# EAGLE board midi-vidi (EAGLE 6.6.0)
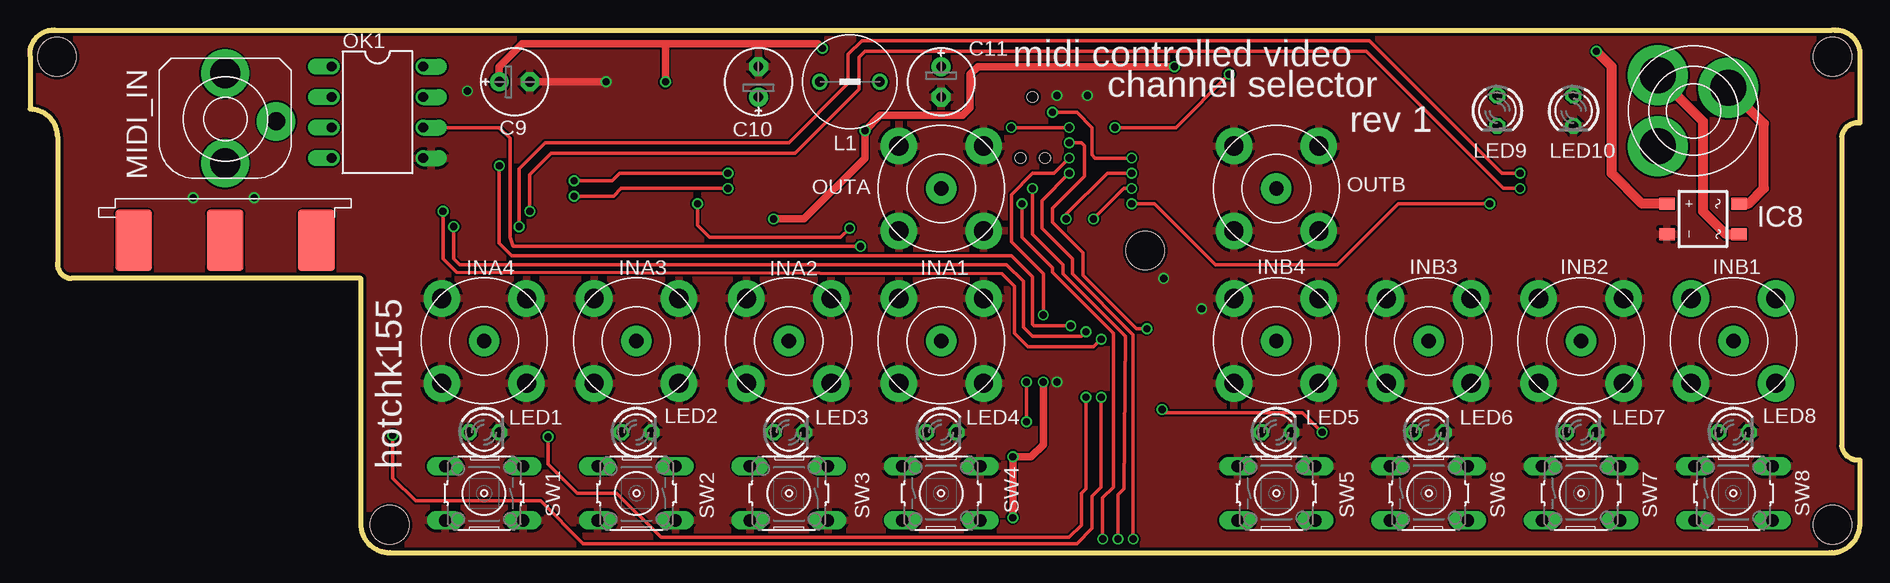
[diagram p0: board, top side]
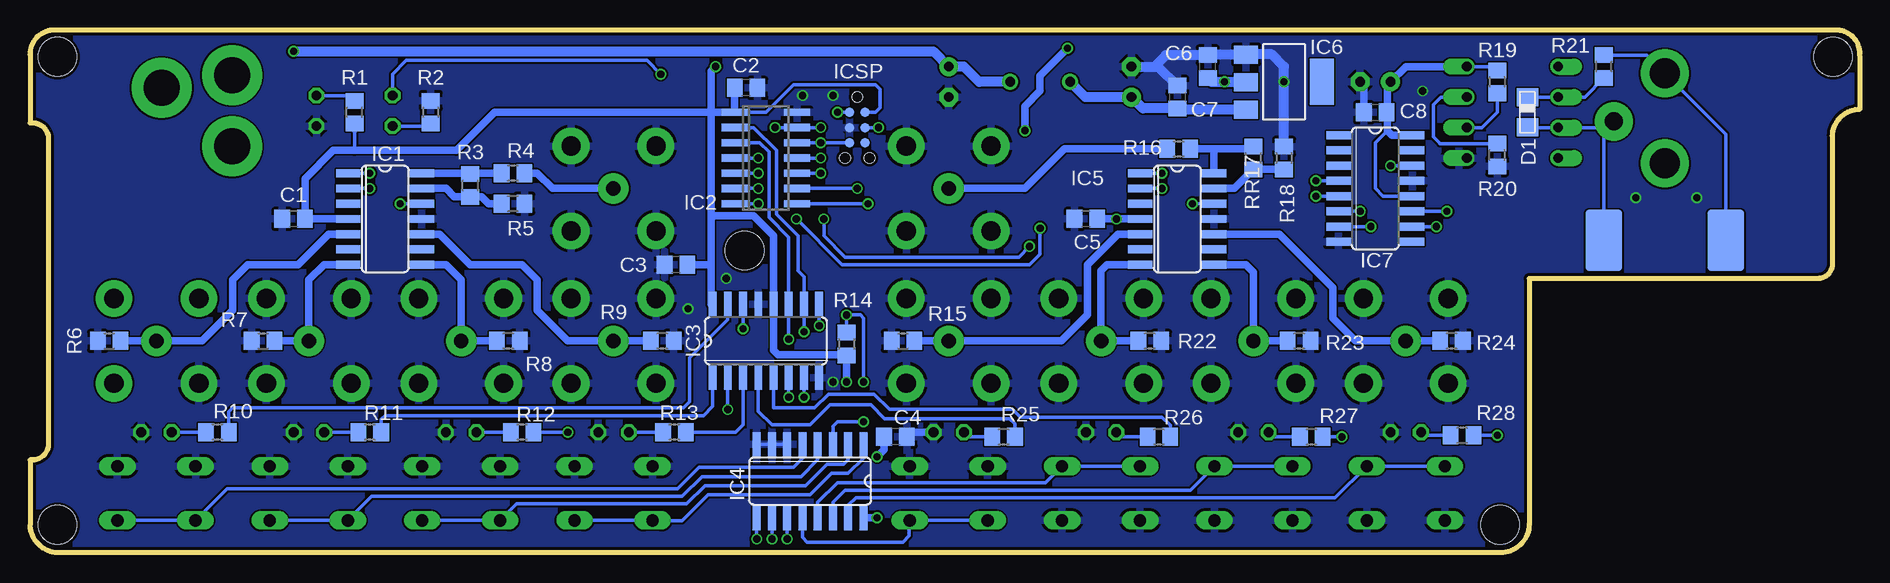
[diagram p1: board, bottom side, seen from below]

Size 152.53 x 43.56 mm. Coordinates in mm from the lower left corner, seen from the top.
Outline: 150.25,43.56 2.04,43.56 arc97 0.01,41.4 0.01,36.96 arc-90 2.29,34.67 2.29,24.13 arc90 3.44,22.86 27.57,22.86 27.57,2.41 arc90 29.98,0 149.99,0 arc90 152.53,2.29 152.53,7.75 arc-90 151.01,8.89 151.01,34.67 arc-90 152.53,35.82 152.53,41.53 arc90 150.5,43.56 150.38,43.56
Copper layers (1*16): Top 0.035mm / dielectric 1.5mm / Bottom 0.035mm
Design rules "ITEADstudio_DRC": minimum track width 6mil, minimum drill 12mil, track to track 6mil, track to pad 6mil, pad to pad 6mil, via to via 6mil, smd to smd 0mil, copper to edge 10mil, drill to drill 10mil, minimum pad ring 10mil, minimum via ring 6mil, stop-mask expansion 2mil, vias tented up to drill 100mil, thermal gap 10mil
Holes 3.2 mm at 29.98,2.33 150.26,2.33 2.26,41.33 150.26,41.33 92.97,25.2

## Footprints (pad centres in the part's own frame; a part is rotated, then mirrored left to right if it is on the bottom)
C0805 = smd 1.3 x 1.5: 1 -0.95,0; 2 0.95,0
E2,5-6E = drill 0.813 pad 1.575: + -1.27,0 | drill 0.813 pad 1.575 octagon: - 1.27,0
0805DIODE = smd 1.524 x 1.778: A -1.262,-0.005; C 1.238,-0.005
SO14 = smd 0.66 x 2.032: 1 -3.81,-3.073; 2 -2.54,-3.073; 3 -1.27,-3.073; 4 0,-3.073; 5 1.27,-3.073; 6 2.54,-3.073; 7 3.81,-3.073; 8 3.81,3.073; 9 2.54,3.073; 10 1.27,3.073; 11 0,3.073; 12 -1.27,3.073; 13 -2.54,3.073; 14 -3.81,3.073
SO14' = smd 0.6 x 2.2: 1 -3.81,-2.6; 2 -2.54,-2.6; 3 -1.27,-2.6; 4 0,-2.6; 5 1.27,-2.6; 6 2.54,-2.6; 7 3.81,-2.6; 8 3.81,2.6; 9 2.54,2.6; 10 1.27,2.6; 11 0,2.6; 12 -1.27,2.6; 13 -2.54,2.6; 14 -3.81,2.6
SO16 = smd 0.66 x 2.032: 1 -4.445,-3.073; 2 -3.175,-3.073; 3 -1.905,-3.073; 4 -0.635,-3.073; 5 0.635,-3.073; 6 1.905,-3.073; 7 3.175,-3.073; 8 4.445,-3.073; 9 4.445,3.073; 10 3.175,3.073; 11 1.905,3.073; 12 0.635,3.073; 13 -0.635,3.073; 14 -1.905,3.073; 15 -3.175,3.073; 16 -4.445,3.073
SOT223 = smd 1.499 x 2.007: 1 -2.261,-3.15; 2 0.025,-3.15; 3 2.311,-3.15 | smd 3.81 x 2.007: 4 0,3.15
MBS = smd 1 x 1.3: + -1.27,-3; - 1.27,-3; AC1 -1.27,3; AC2 1.27,3
TC2030-MCP-NL = smd 0.787 x 0.787: 1 1.27,-0.635; 2 1.27,0.635; 3 2.54,-0.635; 4 2.54,0.635; 5 3.81,-0.635; 6 3.81,0.635 | hole 0.889: 0,0; 5.08,-1.016; 5.08,1.016
RCAVERT = drill 1.6 pad 3.048: P$2 -5,0; P$3 5,0; P$4 0,5; P$5 0,-5 | drill 1.2 pad 2.54: PIN 0,0
WE-TI_L = drill 0.813: 1 -2.5,0; 2 2.5,0
LED3MM = drill 0.813 octagon: A -1.27,0; K 1.27,0
VERTICAL_3_5MM_SOCKET = drill 2.5 pad 4: 2 0,-3.75; 4 0,3.75 | drill 1.5 pad 3.2: 3 4.25,-0.25
EDGEDIN = smd 3.048 x 5.08: 1 -7.62,-10.16; 2 0,-10.16; 3 7.62,-10.16 | smd 3.048 x 5.08 bottom: 4 -5.08,-10.16; 5 5.08,-10.16
DIL08 = drill 0.813 offset: 1 -3.81,-3.81; 2 -1.27,-3.81; 3 1.27,-3.81; 4 3.81,-3.81; 5 3.81,3.81; 6 1.27,3.81; 7 -1.27,3.81; 8 -3.81,3.81
R0805 = smd 1.3 x 1.5: 1 -0.95,0; 2 0.95,0
B3F-10XX = drill 1.016 long: 1 -3.251,2.261; 2 3.251,2.261; 3 -3.251,-2.261; 4 3.251,-2.261
PWR_SOCKET_2_1MM = drill 3 pad 5: BARREL 0,4.2; NC -4.2,0; PIN 3.4,-0.7

## Placement (x,y rotation side)
C1  [C0805]  130.56,27.81 180 bottom
C2  [C0805]  92.84,38.74 180 bottom
C3  [C0805]  98.69,24 180 bottom
C4  [C0805]  80.4,9.65 180 bottom
C5  [C0805]  64.52,27.81 180 bottom
C6  [C0805]  54.36,40.51 90 bottom
C7  [C0805]  56.9,37.97 270 bottom
C8  [C0805]  40.39,36.7 0 bottom
C9  [E2,5-6E]  40.39,39.24 0 top
C10  [E2,5-6E]  60.71,39.24 90 top
C11  [E2,5-6E]  75.95,39.24 270 top
D1  0805DIODE  [0805DIODE]  27.69,36.7 270 bottom
IC1  MAX4311SO14  [SO14]  122.94,27.81 270 bottom
IC2  PIC16F1825SO14  [SO14']  91.19,32.89 270 bottom
IC3  74HC595D  [SO16]  91.19,17.65 0 bottom
IC4  4051D  [SO16]  87.51,5.97 180 bottom
IC5  MAX4311SO14  [SO14]  56.9,27.81 270 bottom
IC6  REG1117  [SOT223]  48.01,39.24 270 bottom
IC7  74HC595D  [SO16]  40.39,30.35 270 bottom
IC8  B1S  [MBS]  139.45,27.81 270 top
ICSP  [TC2030-MCP-NL]  83.57,37.97 270 bottom
INA1  RCAVERT  [RCAVERT]  75.95,17.65 45 top
INA2  RCAVERT  [RCAVERT]  63.25,17.65 45 top
INA3  RCAVERT  [RCAVERT]  50.55,17.65 45 top
INA4  RCAVERT  [RCAVERT]  37.85,17.65 45 top
INB1  RCAVERT  [RCAVERT]  141.99,17.65 45 top
INB2  RCAVERT  [RCAVERT]  129.29,17.65 45 top
INB3  RCAVERT  [RCAVERT]  116.59,17.65 45 top
INB4  RCAVERT  [RCAVERT]  103.89,17.65 45 top
L1  [WE-TI_L]  68.33,39.24 0 top
LED1  [LED3MM]  37.85,10.03 0 top
LED2  [LED3MM]  50.55,10.03 0 top
LED3  [LED3MM]  63.25,10.03 0 top
LED4  [LED3MM]  75.95,10.03 0 top
LED5  [LED3MM]  103.89,10.03 0 top
LED6  [LED3MM]  116.59,10.03 0 top
LED7  [LED3MM]  129.29,10.03 0 top
LED8  [LED3MM]  141.99,10.03 0 top
LED9  [LED3MM]  122.31,36.83 270 top
LED10  [LED3MM]  128.66,36.83 270 top
MIDI  VERTICAL_3_5MM_SOCKET  [VERTICAL_3_5MM_SOCKET]  16.26,36.2 0 top
MIDI_IN  DIN5PIN  [EDGEDIN]  16.26,36.2 0 top
OK1  6N138  [DIL08]  28.96,36.7 270 top
OUTA  RCAVERT  [RCAVERT]  75.95,30.35 45 top
OUTB  RCAVERT  [RCAVERT]  103.89,30.35 45 top
R1  [R0805]  125.48,36.7 90 bottom
R2  [R0805]  119.13,36.7 270 bottom
R3  [R0805]  115.83,30.61 90 bottom
R4  [R0805]  112.28,31.62 180 bottom
R5  [R0805]  112.28,29.08 180 bottom
R6  [R0805]  145.93,17.65 0 bottom
R7  [R0805]  133.1,17.65 0 bottom
R8  [R0805]  112.66,17.65 180 bottom
R9  [R0805]  99.83,17.65 180 bottom
R10  [R0805]  136.91,10.03 180 bottom
R11  [R0805]  124.21,10.03 180 bottom
R12  [R0805]  111.51,10.03 180 bottom
R13  [R0805]  98.81,10.03 180 bottom
R14  [R0805]  84.46,17.4 270 bottom
R15  [R0805]  79.76,17.65 0 bottom
R16  [R0805]  56.78,33.66 0 bottom
R18  [R0805]  48.01,32.89 270 bottom
R19  [R0805]  30.23,39.24 270 bottom
R20  [R0805]  30.23,33.15 90 bottom
R21  [R0805]  21.34,40.51 90 bottom
R22  [R0805]  59.19,17.65 180 bottom
R23  [R0805]  46.74,17.65 180 bottom
R24  [R0805]  34.04,17.65 180 bottom
R25  [R0805]  71.38,9.65 180 bottom
R26  [R0805]  58.43,9.65 180 bottom
R27  [R0805]  45.73,9.65 180 bottom
R28  [R0805]  33.15,9.78 180 bottom
RR17  [R0805]  50.55,32.89 90 bottom
SW1  [B3F-10XX]  37.85,4.95 180 top
SW2  [B3F-10XX]  50.55,4.95 180 top
SW3  [B3F-10XX]  63.25,4.95 180 top
SW4  [B3F-10XX]  75.95,4.95 0 top
SW5  [B3F-10XX]  103.89,4.95 0 top
SW6  [B3F-10XX]  116.59,4.95 0 top
SW7  [B3F-10XX]  129.29,4.95 0 top
SW8  [B3F-10XX]  141.99,4.95 0 top
U$2  PWR_SOCKET_2_1MM  [PWR_SOCKET_2_1MM]  138.66,36.83 45 top

## Library data of the parts
C1-C11 R1-R16 R18-R28 RR17 = rcl
D1 IC2 = jasons_stuff
IC1 IC5 INA1-INA4 INB1-INB4 MIDI MIDI_IN OUTA OUTB U$2 = jason_eagle6
IC3 IC7 = 74xx-eu
IC4 = 40xx
IC6 = burr-brown; MPN: REG1117; OC_FARNELL: 1097566; OC_NEWARK: 14P6981
IC8 = rectifier
ICSP = tag-connect
L1 = wuerth-elektronik
LED1-LED10 = led
OK1 = optocoupler; MF: VISHAY/TELEFUNKEN; MPN: 6N138; OC_FARNELL: 9860150; OC_NEWARK: 35K5294
SW1-SW8 = switch-omron; MPN: B3F-1000; OC_FARNELL: 176432; OC_NEWARK: 36M3542

## Nets
A0A: IC5.2 IC7.5
A0B: IC1.2 IC7.6
A1A: IC5.1 IC7.4
A1B: IC1.1 IC7.7
AD0: IC2.8 IC4.11
AD1: IC2.9 IC4.10
AD2: IC2.10 IC4.9
DAT: IC2.12 IC3.14 ICSP.5
GND: C1.2 C2.1 C3.2 C4.1 C5.2 C6.2 C7.1 C8.1 C9.- C10.- C11.- IC1.11 IC2.14 IC3.8 IC3.13 IC4.6 IC4.7 IC4.8 IC5.11 IC6.1 IC7.8 IC7.13 IC8.- ICSP.3 INA1.P$2 INA1.P$3 INA1.P$4 INA1.P$5 INA2.P$2 INA2.P$3 INA2.P$4 INA2.P$5 INA3.P$2 INA3.P$3 INA3.P$4 INA3.P$5 INA4.P$2 INA4.P$3 INA4.P$4 INA4.P$5 INB1.P$2 INB2.P$2 INB2.P$3 INB2.P$4 INB2.P$5 INB3.P$2 INB3.P$3 INB3.P$4 INB3.P$5 INB4.P$2 INB4.P$3 INB4.P$4 INB4.P$5 LED1.K LED2.K LED3.K LED4.K LED5.K LED6.K LED7.K LED8.K LED10.K OK1.5 OUTA.P$2 OUTA.P$3 OUTA.P$4 OUTA.P$5 OUTB.P$2 OUTB.P$3 OUTB.P$4 OUTB.P$5 R2.1 R5.1 R6.1 R7.1 R8.1 R9.1 R15.1 R18.1 R20.1 R22.1 R23.1 R24.1 SW1.1 SW1.2 SW2.1 SW2.2 SW3.1 SW3.2 SW4.1 SW4.2 SW5.1 SW5.2 SW6.1 SW6.2 SW7.1 SW7.2 SW8.1 SW8.2
IN: IC2.11 IC4.3 R14.1
MIDI: IC2.5 OK1.6 R19.2
N$1: IC5.10 INA4.PIN R24.2
N$2: IC5.8 INA3.PIN R23.2
N$3: IC5.7 INA2.PIN R22.2
N$4: IC5.5 INA1.PIN R15.2
N$5: IC5.14 R16.2 RR17.2
N$6: IC5.13 R18.2 RR17.1
N$7: OUTA.PIN R16.1
N$8: D1.A OK1.2 R21.1
N$9: MIDI.4 MIDI_IN.4 R21.2
N$10: IC1.7 INB2.PIN R7.2
N$11: IC1.8 INB3.PIN R8.2
N$12: IC1.5 INB1.PIN R6.2
N$13: IC1.14 R3.2 R4.2
N$14: IC1.13 R3.1 R5.2
N$15: C7.2 C10.+ IC6.3 L1.1
N$16: OUTB.PIN R4.1
N$17: IC1.10 INB4.PIN R9.2
N$18: D1.C MIDI.3 MIDI_IN.5 OK1.3
N$19: LED8.A R10.2
N$20: LED7.A R11.2
N$21: LED6.A R12.2
N$22: OK1.7 R20.2
N$23: IC3.15 R10.1
N$24: LED5.A R13.2
N$25: IC3.1 R11.1
N$26: IC3.2 R12.1
N$27: IC3.3 R13.1
N$28: IC3.4 R25.1
N$29: IC3.5 R26.1
N$30: IC3.6 R28.1
N$31: IC3.7 R27.1
N$32: LED4.A R25.2
N$33: LED3.A R26.2
N$34: LED1.A R28.2
N$35: LED2.A R27.2
N$36: LED9.K R2.2
N$37: IC4.4 SW7.3 SW7.4
N$38: IC4.2 SW6.3 SW6.4
N$39: IC4.5 SW8.3 SW8.4
N$40: IC4.1 SW5.3 SW5.4
N$41: IC4.12 SW4.3 SW4.4
N$42: IC4.15 SW1.3 SW1.4
N$43: IC4.14 SW2.3 SW2.4
N$44: IC4.13 SW3.3 SW3.4
N$45: IC2.13 ICSP.4 LED9.A
N$46: IC8.AC1 U$2.PIN
N$47: IC3.9 IC7.14
N$48: IC2.4 ICSP.1
N$49: IC8.AC2 U$2.BARREL
N$50: LED10.A R1.2
N$51: C11.+ IC8.+ L1.2
NSHDNA: IC2.6 IC5.12
NSHDNB: IC1.12 IC2.7
SH_CLK: IC2.3 IC3.11 IC7.11
ST_CLK: IC2.2 IC3.10 IC7.10
VCC: C1.1 C2.2 C3.1 C4.2 C5.1 C6.1 C8.2 C9.+ IC1.4 IC2.1 IC3.12 IC3.16 IC4.16 IC5.4 IC6.2 IC7.12 IC7.16 ICSP.2 OK1.8 R1.1 R14.2 R19.1

## Tracks (layer width: path | path; a pad name or v marks a point on that pad's centre or on a via)
A0A  (via drill 0.6)
  Top 0.305: v45.35,29.72 48.65,29.72 49.28,30.35 v58.17,30.35
  Bottom 0.305: IC7.5 v45.35,29.72 | v58.17,30.35 IC5.2
A0B  (via drill 0.6)
  Top 0.305: v124.21,30.35 122.82,30.35 111.39,41.78 69.6,41.78 69.1,41.28 69.1,38.61 63.76,33.28 43.44,33.28 41.66,31.5 v41.66,28.45
  Bottom 0.305: IC7.6 v41.66,28.45 | 126.75,30.35 IC1.2 v124.21,30.35
A1A  (via drill 0.6)
  Top 0.305: v45.35,30.99 48.52,30.99 49.16,31.62 v58.17,31.62
  Bottom 0.305: IC7.4 v45.35,30.99 | v58.17,31.62 IC5.1
A1B  (via drill 0.6)
  Top 0.305: v124.21,31.62 122.69,31.62 111.64,42.67 69.35,42.67 68.21,41.53 68.21,39.12 63.25,34.16 42.93,34.16 40.77,32.01 v40.77,27.18
  Bottom 0.305: IC1.1 v124.21,31.62 | v40.77,27.18 IC7.7
AD0  (via drill 0.6)
  Top 0.305: v89.42,1.14 89.42,4.57 90.3,5.46 90.3,18.29 85.22,23.37 85.22,23.75 82.68,26.29 v82.68,29.08
  Bottom 0.305: IC4.11 v89.42,1.14 | IC2.8 v82.68,29.08
AD1  (via drill 0.6)
  Top 0.305: v90.69,1.14 90.69,4.83 91.19,5.34 91.32,18.04 86.11,23.24 86.11,24 83.57,26.54 v83.57,30.35
  Bottom 0.305: IC4.10 v90.69,1.14 | IC2.9 v83.57,30.35
AD2  (via drill 0.6)
  Top 0.305: v91.96,1.14 91.96,18.16 86.88,23.24 86.88,24.51 84.34,27.05 84.34,29.34 v86.62,31.62
  Bottom 0.305: IC4.9 v91.96,1.14 | IC2.10 v86.62,31.62
DAT  (via drill 0.6)
  Top 0.305: v86.62,34.16 87.64,34.16 87.89,33.91 87.89,31.37 85.22,28.7 85.22,27.56 87.76,25.02 87.76,23.12 92.21,18.67 v93.1,18.67
  Bottom 0.305: ICSP.5 v86.62,34.16 IC2.12 | IC3.14 v93.1,18.67
GND  (via drill 0.6)
  Top 0.61: C9.- v48.01,39.24
  Bottom 0.305: IC4.8 IC4.7 IC4.6
  Bottom 0.61: LED4.K 79.07,10.03 C4.1 | C8.1 41.34,38.92 C9.-
  Bottom 0.813: C10.- 58.81,40.51 | 58.81,40.51 58.49,40.51 C7.1 | 58.81,40.51 57.86,41.46 C6.2 54.32,41.51 IC6.1 51.14,41.53 49.03,41.53 48.01,40.51 v48.01,39.24 R18.1
  other vias: 13.6,29.59 18.68,29.59 36.46,38.48 97.67,20.32 94.5,22.86 85.61,14.23 85.61,38.1 88.15,38.1
  pour Bottom: -4.06,45.59 -4.06,-2.67 157.23,-2.67 157.23,48.13 -4.06,48.13
  pour Top: -2.79,46.86 -2.79,-3.94 155.96,-3.94 155.96,48.13 -2.79,48.13
IN  (via drill 0.6)
  Top 0.305: v84.46,19.81 84.46,23.24 81.8,25.91 81.8,29.85 83.57,31.62 85.35,31.62 v86.62,32.89 | v83.07,10.92 v83.07,14.23
  Bottom 0.305: IC2.11 v86.62,32.89 | R14.1 v84.46,19.81 83.32,19.81 83.07,19.56 v83.07,14.23 | IC4.3 85.61,10.54 85.22,10.92 v83.07,10.92
MIDI  (via drill 0.6)
  Top 0.305: v91.83,31.62 89.8,31.62 86.37,28.2 v86.37,27.81 | OK1.6 39.12,35.43 40.01,34.55 40.01,26.29 40.27,25.53 v69.22,25.53
  Bottom 0.305: IC2.5 v91.83,31.62 | v86.37,27.81 86.37,26.42 84.59,24.64 70.11,24.64 v69.22,25.53 | OK1.6 31.5,35.43 30.23,36.7 R19.2
N$1
  Bottom 0.61: R24.2 INA4.PIN 42.04,17.65 43.95,19.56 43.95,22.1 48.39,26.54 IC5.10
N$2
  Bottom 0.61: IC5.8 51.19,24 50.55,23.37 INA3.PIN R23.2
N$3
  Bottom 0.61: IC5.7 62.75,24 63.25,23.5 INA2.PIN R22.2
N$4
  Bottom 0.61: R15.2 INA1.PIN 66.56,17.65 64.4,19.81 64.4,24 61.86,26.54 IC5.5
N$5
  Bottom 0.61: R16.2 53.86,33.66 | 53.86,33.66 50.74,33.66 RR17.2 | IC5.14 53.83,33.63 53.86,33.66
N$6
  Bottom 0.61: R18.2 RR17.1 52.14,30.35 IC5.13
N$7
  Bottom 0.61: R16.1 66.3,33.66 69.6,30.35 OUTA.PIN
N$8
  Bottom 0.305: R21.1 22.93,37.97 OK1.2 27.69,37.97 D1.A
N$9
  Bottom 0.305: MIDI_IN.4 11.18,34.87 MIDI.4 17.78,41.46 R21.2
N$10
  Bottom 0.61: IC1.7 128.02,24 129.29,22.73 INB2.PIN R7.2
N$11
  Bottom 0.61: IC1.8 117.86,24 116.59,22.73 INB3.PIN R8.2
N$12
  Bottom 0.61: IC1.5 127.64,26.54 130.18,24 134.37,24 135.64,22.73 135.64,20.19 138.18,17.65 INB1.PIN R6.2
N$13
  Bottom 0.61: IC1.14 115.9,31.62 R3.2 115.77,31.62 R4.2
N$14
  Bottom 0.61: IC1.13 117.86,30.35 117.17,29.66 R3.1 114.88,29.66 114.31,29.08 R5.2
N$15
  Bottom 0.813: L1.1 64.56,37.97 C10.+ 59.76,37.02 C7.2 56.81,36.93 IC6.3
N$16
  Bottom 0.61: OUTB.PIN 108.97,30.35 110.24,31.62 R4.1
N$17
  Bottom 0.61: IC1.10 118.37,26.54 115.83,24 111.51,24 110.24,22.73 110.24,20.19 107.7,17.65 INB4.PIN R9.2
N$18
  Bottom 0.305: D1.C 27.67,35.43 OK1.3 21.03,35.43 MIDI.3 21.34,35.12 MIDI_IN.5
N$19
  Bottom 0.305: R10.2 LED8.A
N$20
  Bottom 0.305: R11.2 LED7.A
N$21
  Bottom 0.305: R12.2 LED6.A
N$22
  Bottom 0.305: OK1.7 34.93,37.97 35.57,37.34 35.57,34.67 35.19,34.29 35.06,34.16 34.99,34.1 R20.2
N$23
  Bottom 0.305: R10.1 135.96,11.75 135.64,12.07 98.05,12.07 97.54,12.57 97.54,16.26 94.37,19.43 IC3.15
N$24
  Bottom 0.305: R13.2 LED5.A
N$25
  Bottom 0.305: R11.1 123.26,11.11 122.94,11.43 98.81,11.43 97.8,11.43 96.4,11.43 95.64,12.19 IC3.1
N$26  (via drill 0.6)
  Top 0.305: v107.7,10.03 106.05,11.69 94.62,11.69 v94.37,11.94
  Bottom 0.305: R12.1 v107.7,10.03 | v94.37,11.94 IC3.2
N$27
  Bottom 0.305: IC3.3 93.1,10.67 93.73,10.03 R13.1
N$28
  Bottom 0.305: R25.1 70.43,10.74 70.87,11.18 81.29,11.18 82.43,12.32 85.86,12.32 87.51,10.67 90.69,10.67 91.83,11.81 IC3.4
N$29
  Bottom 0.305: R26.1 57.48,10.61 58.17,11.3 69.98,11.3 70.62,11.94 80.91,11.94 82.18,13.21 85.99,13.21 87.13,12.07 90.56,12.07 IC3.5
N$30  (via drill 0.6)
  Top 0.305: v89.29,12.96 89.29,5.46 88.53,4.7 88.53,2.03 87.26,0.76 46.11,0.76 42.55,4.32 32.14,4.32 30.23,6.22 v30.23,9.78
  Bottom 0.305: IC3.6 v89.29,12.96 | v30.23,9.78 R28.1
N$31  (via drill 0.6)
  Top 0.305: v88.02,12.96 88.02,5.34 87.64,4.95 87.64,2.29 86.62,1.27 52.59,1.27 48.9,4.95 45.6,4.95 43.19,7.37 v43.19,9.65
  Bottom 0.305: IC3.7 v88.02,12.96 | v43.19,9.65 R27.1
N$32
  Bottom 0.305: R25.2 74.3,9.65 LED4.A
N$33
  Bottom 0.305: R26.2 61.6,9.65 LED3.A
N$34
  Bottom 0.305: R28.2 36.33,9.78 LED1.A
N$35
  Bottom 0.305: R27.2 48.9,9.65 LED2.A
N$36
  Bottom 0.305: LED9.K 119.33,35.56 R2.2
N$37
  Bottom 0.305: IC4.4 86.88,7.75 88.27,6.35 96.53,6.35 98.18,4.7 124.04,4.7 SW7.3 SW7.4
N$38
  Bottom 0.305: IC4.2 84.34,7.75 84.72,7.37 86.11,7.37 87.89,5.59 96.27,5.59 97.8,4.07 111.97,4.07 SW6.3 SW6.4
N$39
  Bottom 0.305: IC4.5 88.15,7.88 88.91,7.11 96.78,7.11 98.56,5.34 136.1,5.34 SW8.3 SW8.4
N$40
  Bottom 0.305: SW5.3 99.17,2.69 | IC4.1 83.07,7.88 84.34,6.61 85.73,6.61 87.51,4.83 96.02,4.83 98.18,2.67 100.62,2.67 SW5.3 | SW5.3 SW5.4
N$41
  Bottom 0.305: IC4.12 88.15,1.27 87.76,0.89 79.76,0.89 79.26,1.4 79.26,2.64 SW4.4 SW4.3
N$42
  Bottom 0.305: IC4.15 84.34,3.94 83.7,4.57 43.75,4.57 SW1.3 SW1.4
N$43
  Bottom 0.305: IC4.14 85.61,4.19 84.59,5.21 55.81,5.21 SW2.3 SW2.4
N$44
  Bottom 0.305: IC4.13 86.88,4.19 85.22,5.84 67.88,5.84 SW3.3 SW3.4
N$45  (via drill 0.6)
  Top 0.305: v86.62,35.43 v81.8,35.43 | v99.96,39.88 95.51,35.43 v90.43,35.43
  Bottom 0.305: v86.62,35.43 IC2.13 v90.43,35.43 | v81.8,35.43 ICSP.4 | LED9.A 122.31,39.88 121.17,41.02 101.1,41.02 v99.96,39.88
N$46
  Top 0.813: IC8.AC1 143.26,29.08 144.53,30.35 144.53,35.76 U$2.PIN
N$47  (via drill 0.6)
  Top 0.305: v86.75,18.92 83.7,18.92 83.57,19.05 83.57,22.99 81.8,24.77 40.14,24.77 39.12,25.78 v39.12,32.26
  Bottom 0.305: IC7.14 v39.12,32.26 | v86.75,18.92 IC3.9
N$48  (via drill 0.6)
  Top 0.305: v85.22,36.7 87.26,36.7 88.53,35.43 88.53,33.15 88.78,32.89 v91.83,32.89
  Bottom 0.305: ICSP.1 v85.22,36.7 | v91.83,32.89 IC2.4
N$49
  Top 0.813: U$2.BARREL 135.69,39.71 139.45,35.94 139.45,28.45 141.36,26.54 IC8.AC2
N$50
  Bottom 0.305: LED10.A 125.93,38.1 R1.2
N$51  (via drill 0.6)
  Top 0.813: IC8.+ 134.37,29.08 131.83,31.62 131.83,40.51 v130.56,41.78
  Bottom 0.813: v130.56,41.78 77.22,41.78 C11.+ 74.68,40.51 73.41,39.24 L1.2
NSHDNA  (via drill 0.6)
  Top 0.305: v91.83,30.35 91.19,30.35 v88.65,27.81 | v55.63,29.08 55.63,27.31 56.65,26.29 67.57,26.29 v68.33,27.05
  Bottom 0.305: IC2.6 v91.83,30.35 | v88.65,27.81 84.84,24 69.22,24 68.33,24.89 v68.33,27.05 | v55.63,29.08 IC5.12
NSHDNB  (via drill 0.6)
  Top 0.305: v91.83,29.08 93.73,29.08 98.81,24 108.97,24 114.05,29.08 v121.67,29.08
  Bottom 0.305: IC2.7 v91.83,29.08 | v121.67,29.08 IC1.12 119.13,29.08
SH_CLK  (via drill 0.6)
  Top 0.305: v34.42,28.45 34.42,24.51 35.57,23.37 81.03,23.24 82.05,22.23 82.05,18.29 83.19,17.15 88.65,17.15 v89.29,17.78
  Bottom 0.305: IC7.11 v34.42,28.45 | v89.29,17.78 IC3.11 89.29,26.29 90.94,27.94 90.94,33.4 91.7,34.16 IC2.3
ST_CLK  (via drill 0.6)
  Top 0.305: v35.31,27.18 35.31,24.51 35.82,24 81.41,24 82.81,22.61 82.81,18.8 83.57,18.04 87.64,18.04 v88.02,18.42
  Bottom 0.305: IC7.10 v35.31,27.18 | v88.02,18.42 IC3.10 88.02,22.99 88.53,23.5 88.53,26.42 90.3,28.2 90.3,33.53 92.21,35.43 IC2.2
VCC  (via drill 0.6)
  Top 0.61: v95.38,40.51 79,40.51 78.37,39.88 78.37,37.09 77.73,36.45 70.87,36.45 v69.6,35.18 69.6,32.89 64.52,27.81 v61.98,27.81 | v81.92,2.92 v81.92,8 83.45,8 84.46,9.02 v84.46,14.23 | C9.+ 39.12,40.51 41.03,42.42 53.09,42.42 | 53.09,42.42 65.67,42.42 v66.05,42.04 | v52.97,39.24 52.97,42.29 53.09,42.42
  Bottom 0.305: 39,36.26 C8.2 | IC7.12 39.76,29.72 40.39,30.35 40.39,34.16 39.38,35.18 | OK1.8 30.55,40.51 R19.1 | ICSP.2 82.05,36.7 81.67,37.09 81.67,38.61 82.05,38.99 88.91,38.99 91.19,36.7 IC2.1 | 95.64,27.31 95.77,27.18 | 125.48,35.31 125.48,33.53 | 84.84,16.38 84.78,16.45 R14.2 84.9,16.89
  Bottom 0.61: IC1.4 C1.1 129.61,31.18 127.26,33.53 125.48,33.53 116.97,33.53 113.8,36.7 95.77,36.7 | R1.1 125.48,35.31 | 95.77,36.7 IC2.1 C2.2 | 39.38,36.77 39.38,38.99 C9.+ 37.85,40.51 OK1.8 | 39.38,36.77 C8.2 | IC7.16 39,34.8 39.38,35.18 39.38,36.77 | C5.1 v61.98,27.81 IC5.4 | 95.77,24 95.77,27.18 95.77,27.81 | IC3.16 95.74,20.73 95.77,20.7 95.77,24 | C3.1 95.77,24 | IC4.16 81.95,2.9 v81.92,2.92 | v84.46,14.23 R14.2 84.52,16.51 90.18,16.51 90.56,16.89 IC3.12 90.56,26.42 92.21,28.07 95.51,28.07 95.77,27.81 | C4.2 81.35,8.58 v81.92,8 | 95.77,36.7 95.77,40.13 v95.38,40.51 | 95.77,27.81 95.77,36.7 | v69.6,35.18 69.6,37.21 68.33,38.48 68.33,39.75 v66.05,42.04
  Bottom 0.813: C6.1 54.02,39.22 IC6.2 52.94,39.22 v52.97,39.24

## Text on the board
tNames: midi controlled video | channel selector | rev 1 | hotchk155